# Altium PCB Small_light_board1.PcbDoc
Units mm, origin at the board's own origin, x right, y up, seen from the top; angles counter-clockwise.
Board outline 7 x 12 mm, 2 copper layers (Top Layer, Bottom Layer); 1 components, 4 nets, 7 pads, 0 vias.
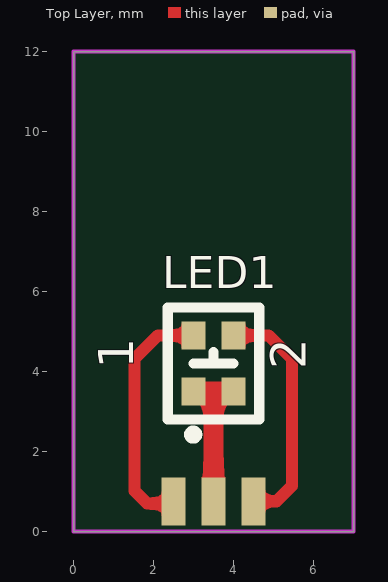
[diagram p0: Top Layer view]
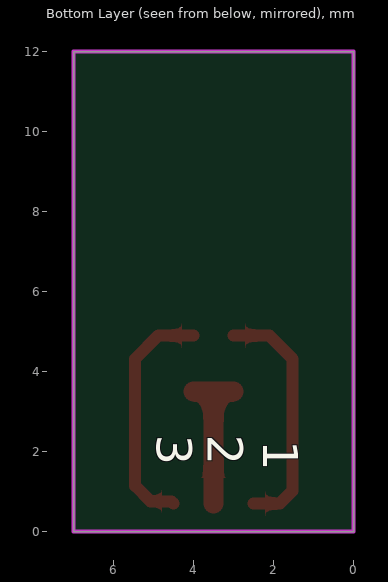
[diagram p1: Bottom Layer view, seen from below]

## Layer stack, top to bottom
Top Solder: solder mask 0.0102, Solder Resist, Dk 3.5
Top Layer: signal copper 0.0356
Dielectric 1: dielectric 0.32, FR-4, Dk 4.8
Bottom Layer: signal copper 0.0356
Bottom Solder: solder mask 0.0102, Solder Resist, Dk 3.5

## Board outline
0,0 7,0 7,12 0,12

## Design rules (kind name [scope] priority, off if disabled: settings)
Clearance [All] p1: gap=0.12 ignorepadtopadclearanceinfootprint=FALSE
PolygonConnect [All] p1: connectstyle=Relief reliefconductorwidth=0.254 reliefentries=4 polygonreliefangle="90 Angle" airgapwidth=0.254
RoutingVias [All] p1: holewidth=0.711 width=1.27 viastyle="Through Hole" minholewidth=0.711 minwidth=1.27 maxholewidth=0.711 maxwidth=1.27
SolderMaskExpansion [All] p1: expansion=0.102 istentingtop=FALSE
Width [All] p1: maxlimit=0.8 minlimit=0.15 preferedwidth=0.254
30 further rules are at their usual default settings.

## Components (designator, comment, footprint, x,y, rotation, side; value= is the part's Value field where it differs from the comment)
LED1 "Comment" LED-ARRAY-SMD_4P-L1.6-W1.5 3.5,4.2 r90 top locked

## Footprints (in the part's own frame and the unit in brackets; to place one, negate y for a bottom-side part, rotate by r counter-clockwise, add the part's x,y. Pads: shape width x height; smd on the part's side, far side on the other; paste and mask are expansions set on the pad)
LED-ARRAY-SMD_4P-L1.6-W1.5 [mm]
  rect 0.7x0.6 smd: 1(-0.7,0.5) 2(-0.7,-0.5) 3(0.7,0.5) 4(0.7,-0.5)
  silkscreen extent -1.88,-1.14 1.4,1.14, body extent -0.76,-0.75 0.84,0.75, height 0.6

## Free pads (board coordinates)
  rect 0.6x1.2 smd: 34(2.5,0.75) 34(3.5,0.75) 34(4.5,0.75)

## Nets (pads, with @x,y where several pads share a name; then routed paths per layer and width w, separated by ;. In a path a pad name is that pad's centre, name@x,y a point inside that pad or via, vN(x,y) a via of type N, cw(c..) or ccw(c..) an arc to the next point about the centre after c; other vN are vias at no path point)
GND: 
GREEN: LED1.3 pad.34@2.5,0.75 | length 6.1
  Top Layer w0.3: pad.34@2.5,0.7 1.84,0.7 1.524,1.016 1.524,4.318 2.106,4.9 LED1.3
RED: LED1.4 pad.34@4.5,0.75 | length 6
  Top Layer w0.3: LED1.4 4.879,4.9 5.461,4.318 5.461,1.143 5.074,0.756 4.556,0.756 pad.34@4.5,0.7
VCC: LED1.1 LED1.2 pad.34@3.5,0.75 | length 3.8
  Top Layer w0.5: LED1.1 3.5,3.5 ; pad.34@3.5,0.7 3.5,0.75 3.5,3.5 ; LED1.2 3.5,3.5

## Keep-outs
Keep-Out Layer:
  the board outline again, w0.1

## Silkscreen, mask and mechanical layers (free items; w line width, h text height)
Top Overlay:
  text "1" at 1.778,4.064 h1.5 r90
  text "2" at 6.096,4.063 h1.5 r90
Bottom Overlay:
  text "2" at 3.937,2.414 h1.5 r90
  text "3" at 5.207,2.413 h1.5 r90
  text "1" at 2.54,2.286 h1.5 r90